# Altium PCB BMS.PcbDoc (part 2 of 2)
Units mil, origin at the board's own origin, x right, y up, seen from the top; angles counter-clockwise.
Board outline 4330.71 x 4330.71 mil, 2 copper layers (Top Layer, Bottom Layer); 161 components, 100 nets, 497 pads, 6 vias.
Unrouted connection lines stored in the file: 354.
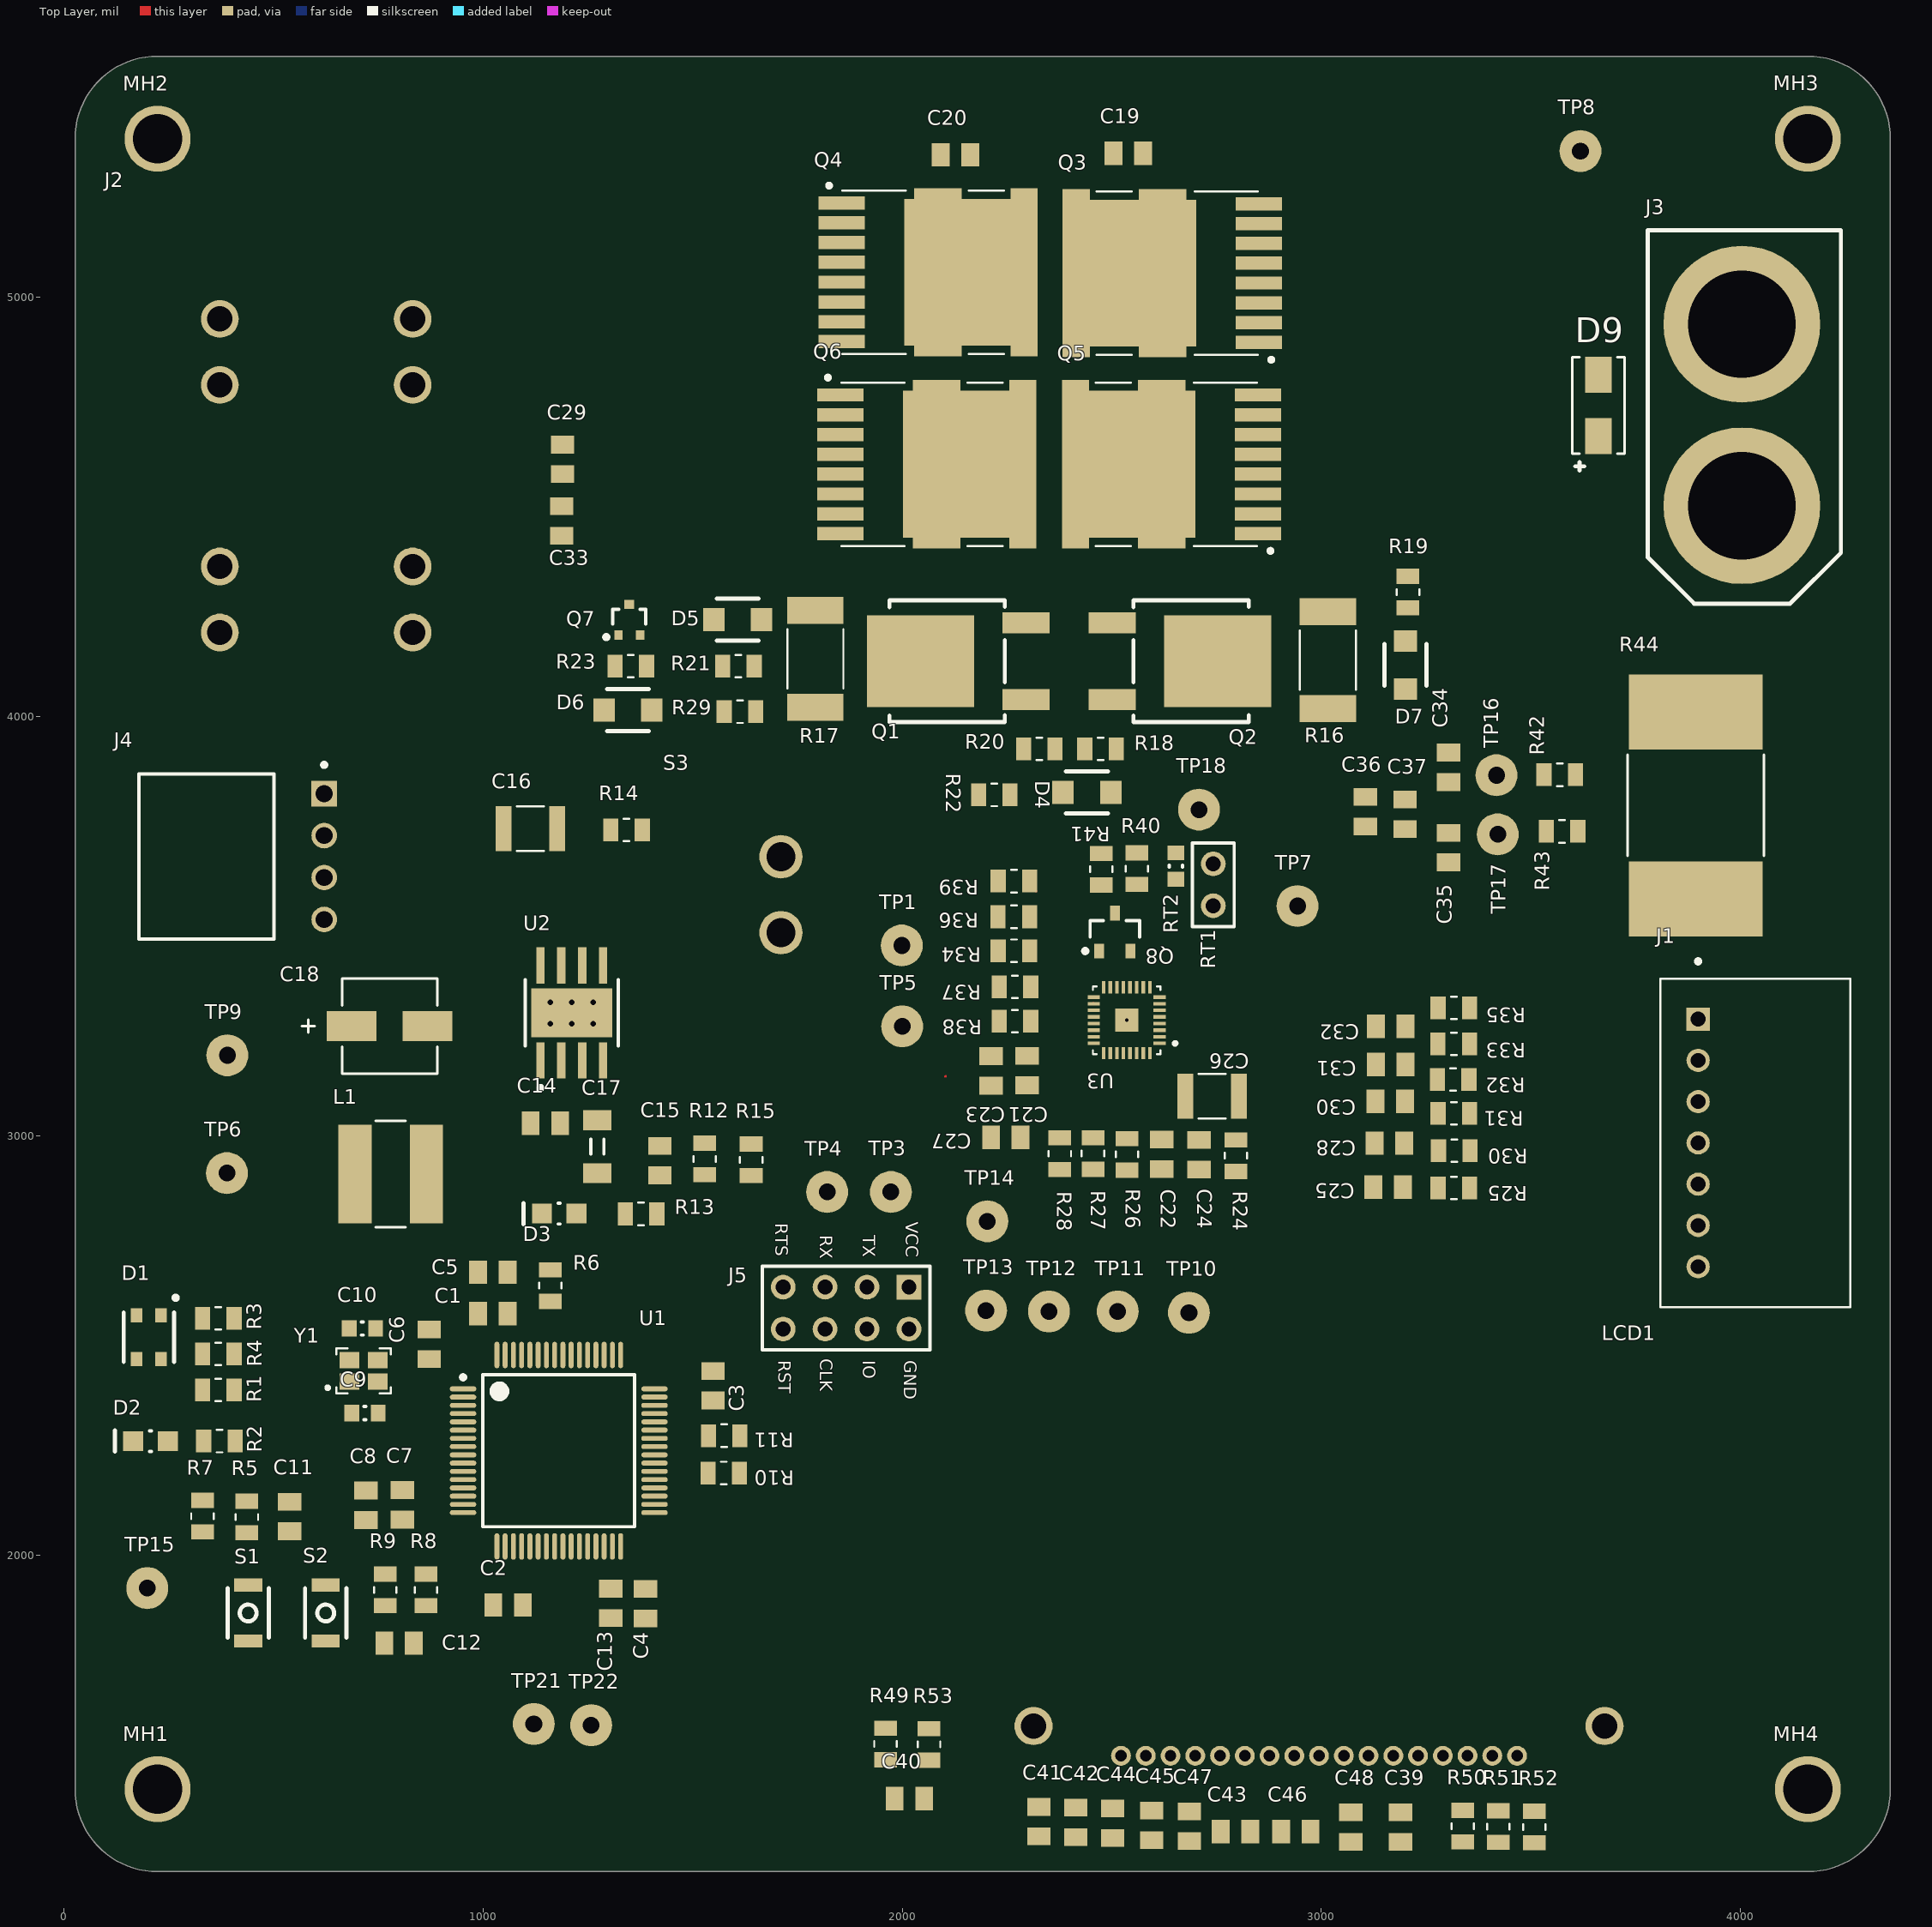
[diagram p0: Top Layer view]

## Part data (continued)
RT2: "THERMISTOR NTC 10K 1% OHM 0603", Case Code (Imperial)=0603, Case Code (Metric)=1608, Manufacturer 1=TDK, Manufacturer Part Number 1=NTCG163JF103FT1, Max Operating Temperature=125°C, Min Operating Temperature=-40°C, Package Quantity=4000, Resistance=10k, Supplier Part Number 1=445-2554-1-ND, Tolerance=1%, Accuracy=1%, Case/Package=0603, ComponentLink1Description=https://datasheet.ciiva.com/11822/0900766b80feea16-11822415.pdf?src-supplier=RSComponents, ComponentLink1URL=https://datasheet.ciiva.com/11822/0900766b80feea16-11822415.pdf?src-supplier=RSComponents, ComponentLink2Description=https://datasheet.ciiva.com/2848/ntcg163jf103ft1-web-2848612.pdf?src-supplier=Digi-Key, ComponentLink2URL=https://datasheet.ciiva.com/2848/ntcg163jf103ft1-web-2848612.pdf?src-supplier=Digi-Key, ComponentLink3Description=https://datasheet.ciiva.com/2848/ntcg163jf103ft1-web-2848610.pdf?src-supplier=Digi-Key, ComponentLink3URL=https://datasheet.ciiva.com/2848/ntcg163jf103ft1-web-2848610.pdf?src-supplier=Digi-Key, ComponentLink4Description=https://datasheet.ciiva.com/2848/ntcg163jf103ft1-web-2848611.pdf?src-supplier=Digi-Key, ComponentLink4URL=https://datasheet.ciiva.com/2848/ntcg163jf103ft1-web-2848611.pdf?src-supplier=Digi-Key, Depth=0.8mm, Height=0.8mm, Lead Free="Lead Free", Length=1.6mm, Mount="Surface Mount", Number of Pins=2, Packaging="Tape and Reel", Pricing 1="1=0.25000, 5=0.23600, 10=0.20900, 25=0.19240, 50=0.15400, 100=0.13200, 500=0.11550, 1000=0.09900 (USD)", Radiation Hardening=No, RoHS=Yes, Stock 1=94107, Supplier 1=Digi-Key
S1 S2: "Tactile Switch (Grey)", Manufacturer 1="Omron Electronics Inc-EMC Div", Manufacturer Part Number 1=B3U-1000P, Supplier Part Number 1=SW1020CT-ND, Mount="Surface Mount", Supplier 1=Digi-Key
S3: "SWITCH SLIDE SPST 500mA (DC) 8.5A (AC) 125V", Current Rating=500mA, Manufacturer 1="CW Industries", Supplier Part Number 1=CWI333-ND, Voltage Rating=125V, Manufacturer Part Number 1=GF-123-0054, Supplier 1=Digi-Key
TP1 TP2 TP3 TP4 TP5 TP6 TP7 TP8 TP9 TP10 TP11 TP12 TP13 TP14 TP15 TP16 TP17 TP18 TP19 TP20 TP21 TP22: "Loop testpoint through-hole pad", Manufacturer 1="Keystone Electronics", Manufacturer Part Number 1=5002, Supplier Part Number 1=36-5002-ND, Mount="Through Hole", Supplier 1=Digi-Key
U1: library part MCU_STM32F446RET6, "ARM Cortex-M4 32-bit MCU+FPU, 512 KB Flash, 128 KB Internal RAM, 50 I/Os, 64-Pin LQFP, -40 to 85 degC, Tray", I/Os (High Current)=50, Operating Frequency(F) (Processor speed) (MHz)=180, Package Description=LQFP64, Package Reference="64-Pin Low-profile Quad Flat Package, Body 10 x 10 mm, Pitch 0.5 mm", Supplier Part Number 1=497-15376-ND, Supply Voltage(Vcc) min (V)=1.7, ComponentLink1Description="Manufacturer URL", ComponentLink1URL=http://www.st.com/, ComponentLink2Description=Datasheet, ComponentLink2URL=http://www.st.com/st-web-ui/static/active/en/resource/technical/document/datasheet/DM00141306.pdf, Core="ARM Cortex-M4", D/A Converter=2, DatasheetVersion="Rev. 6", FLASH Size (Prog) (kB)=512, Internal RAM Size (kB)=128, Mounting Technology="Surface Mount", Packing=Tray, Supplier 1=Digi-Key
U2: library part BUCK_1-28VOUT_1A, "IC REG BUCK ADJUSTABLE 1A 8SOPWR", Manufacturer 1="Texas Instruments", Max Junction Temp=+125°C, Max Supply Voltage=36V, Min Supply Voltage=4V, Nominal Supply Current=75uA, Output Current=1A, Output Voltage=1-28V, Package=DDA0008E, Supplier Part Number 1=296-47267-1-ND, Switching Frequency=400kHz, Temperature="-40°C to +125°C", Temperature Range Low=-40°C, Automotive=No, Category=IC, ComponentLink2Description=Datasheet, ComponentLink2URL=http://www.ti.com/lit/ds/symlink/lmr23610.pdf, Device Class L1="Integrated Circuits (ICs)", Device Class L2="Power Management ICs", Device Class L3="Voltage Regulators - Switching", Digikey Description="IC REG BUCK ADJUSTABLE 1A 8SOPWR", Height=1.7mm, Lead Free=Yes, Manufacturer Part Number 1=LMR23610ADDAR, Max Duty Cycle=97%, Number Of Outputs=1, Octopart=https://octopart.com/lmr23610addar-texas+instruments-68058948, Output Type=AdjustableProgrammable, RoHS=TRUE, Standoff Height=0mm, Supplier 1=Digi-Key, Switching Topology=Buck, Temperature Range High=+125°C
U3: library part BATT_MANAGER, "POWER MANAGEMENT IC: Battery Multi-Function Controller IC Lithium Ion/Polymer 32-VQFN (4x4)", Manufacturer 1="Texas Instruments", Supplier Part Number 1=296-BQ40Z80RSMTCT-ND, Manufacturer Part Number 1=BQ40Z80RSMT, SnapEDA_Link=https://www.snapeda.com/parts/BQ40Z80RSMT/Texas%20Instruments/view-part/2782044/?ref=snap, Supplier 1=Digi-Key
Y1: "CRYSTAL 25.0000MHZ 12PF SMD", Case/Package=SMD/SMT, ESR (Equivalent Series Resistance)=80R, Frequency=25MHz, Frequency Stability=15ppm, Frequency Tolerance=10ppm, Load Capacitance=12pF, Manufacturer 1="Kyocera AVX", Manufacturer Part Number 1=CX2520DB25000H0FLJC1, Max Operating Temperature=85°C, Min Operating Temperature=-30°C, Ratings=AEC-Q200, Supplier Part Number 1=1253-1724-1-ND, ComponentLink1Description=https://media.digikey.com/pdf/Data%20Sheets/AVX%20PDFs/CX2520DB_USY1M-H1-16429-00_Spec.pdf?src-supplier=Digi-Key, ComponentLink1URL=https://media.digikey.com/pdf/Data%20Sheets/AVX%20PDFs/CX2520DB_USY1M-H1-16429-00_Spec.pdf?src-supplier=Digi-Key, Height=0.022inch, Length=0.098inch, Mount="Surface Mount", Packaging="Tape and Reel", Pricing 1="1=0.72000, 10=0.63300, 50=0.59120, 100=0.52250, 500=0.49500, 1000=0.41250 (USD)", RoHS=Yes, Stock 1=11741, Supplier 1=Digi-Key, Width=0.079inch

## Via types
v1: diameter 24.8, hole 12.99, Top Layer to Bottom Layer, 6 vias

## Nets (pads, with @x,y where several pads share a name; then routed paths per layer and width w, separated by ;. In a path a pad name is that pad's centre, name@x,y a point inside that pad or via, vN(x,y) a via of type N, cw(c..) or ccw(c..) an arc to the next point about the centre after c; other vN are vias at no path point)
3V3: C1.2 C2.2 C3.2 C4.2 C5.2 C6.2 C7.2 C8.2 C15.1 C18.1 C38.2 C39.1 C40.1 D1.4 J5.1 J6.4 L1.1 LCD1.12 R5.2 R8.2 R10.2 R11.2 R12.2 R13.2 R45.2 R46.2 R48.2 R49.2 R50.2 R51.2 R52.2 TP9.1 U1.1 U1.13 U1.19 U1.32 U1.48 U1.64
3V3_FB: C15.2 R12.1 R15.2 U2.4
3V3_SW: C14.1 L1.2 U2.1
CELL_1S: J1.2 R35.1
CELL_2S: J1.3 R33.1
CELL_3S: J1.4 R32.1
CELL_4S: J1.5 R31.1
CELL_5S: J1.6 R30.1
CHG: R26.1 TP11.1 U3.29
DEBUG_RX: J5.3 TP4.1 U1.52
DEBUG_TX: J5.2 TP3.1 U1.51
DSG: R28.1 TP13.1 U3.26 | length 30.4
  Top Layer w6: R28.1 2385.09,2994.9 R28.1@2400.2,3010.01
EN_3V3: R14.2 S3.2 U2.5
GND: C1.1 C2.1 C3.1 C4.1 C5.1 C6.1 C7.1 C8.1 C9.1 C10.1 C11.1 C13.1 C16.1 C17.1 C18.2 C21.1 C22.2 C23.1 C24.2 C26.1 C27.1 C34.1 C35.2 C38.1 C39.2 C40.2 C41.1 C42.1 C44.1 C45.1 C47.1 C48.1 D2.2 D3.2 D6.2 D8.2 D9.1 J1.1 J3.2 J4.4 J5.5 J6.3 J6.6 J6.12 J6.13 LCD1.11 LCD1.K Q8.2 R6.2 R14.1 R15.1 R34.2 R37.2 R38.2 R41.1 R42.1 R44.1 R53.1 RT1.2 RT2.2 S1.2 TP6.1 TP7.1 TP14.1 TP15.1 U1.12 U1.18 U1.31 U1.47 U1.63 U2.6 U2.8 U2.9 U3.7 U3.9 U3.12 U3.13 U3.14 U3.15 U3.17 U3.23 U3.27 U3.33 U3.33_1 Y1.2
  other v1: 1160.46,3267.46 1211.65,3267.46 1262.83,3267.46 1160.46,3318.65 1211.65,3318.65 1262.83,3318.65
LCD_A0: LCD1.15 R50.1 U1.27
LCD_MOSI: LCD1.13 TP22.1 U1.23
LCD_SCK: LCD1.14 TP21.1 U1.21
LED: R2.2 U1.8
NetC9_2: C9.2 U1.6 Y1.1
NetC10_2: C10.2 U1.5 Y1.3
NetC11_2: C11.2 R5.1 R7.2 U1.7
NetC12_1: C12.1 S2.2
NetC12_2: C12.2 R8.1 R9.1 U1.26
NetC13_2: C13.2 U1.30
NetC14_2: C14.2 U2.2
NetC17_2: C17.2 U2.3
NetC19_2: C19.2 C20.1
NetC21_2: C21.2 C23.2 R22.1 U3.24 | length 11.3
  Top Layer w6: 2102.78,3141.36 2103.54,3142.13 ; U3.24@2446.8,3220.46 U3.24
NetC22_1: C22.1 C24.1 R24.2 U3.30 | length 4.4
  Top Layer w6: C22.1@2616.8,2993.18 C22.1 ; C24.1@2707.04,2990.94 C24.1@2707.93,2990.04
NetC25_1: C25.1 C28.2 R30.2 U3.1
NetC25_2: C25.2 R25.2 U3.32
NetC26_2: C26.2 U3.31
NetC27_2: C27.2 R29.1 U3.25 | length 42.8
  Top Layer w6: C27.2 2282.27,3003.14 C27.2@2300.53,3021.4 ; U3.25@2480.46,3186.8 U3.25
NetC28_1: C28.1 C30.2 R31.2 U3.2
NetC29_1: C29.1 C33.2
NetC30_1: C30.1 C31.2 R32.2 U3.3
NetC31_1: C31.1 C32.2 R33.2 U3.4
NetC32_1: C32.1 R35.2 U3.5
NetC41_2: C41.2 LCD1.1
NetC42_2: C42.2 LCD1.2
NetC43_1: C43.1 LCD1.7
NetC43_2: C43.2 LCD1.6
NetC44_2: C44.2 LCD1.3
NetC45_2: C45.2 LCD1.4
NetC46_1: C46.1 LCD1.9
NetC46_2: C46.2 LCD1.8
NetC47_2: C47.2 LCD1.5
NetC48_2: C48.2 LCD1.10
NetD1_1: D1.1 R3.2
NetD1_2: D1.2 R4.1
NetD1_3: D1.3 R1.1
NetD2_1: D2.1 R2.1
NetD3_1: D3.1 R13.1
NetD4_1: D4.1 R22.2
NetD4_2: D4.2 Q1.3 Q2.3 Q3.3 Q4.3 Q5.3 Q6.3 R18.2 R20.2
NetD5_2: D5.2 Q4.1 Q6.1 Q7.2 R21.1 R28.2
NetD6_1: D6.1 R23.1
NetD7_1: D7.1 R24.1 TP10.1
NetD8_1: D8.1 R47.1
NetLCD1_A: LCD1.A R49.1 R53.2
NetQ1_1: Q1.1 R17.1
NetQ2_1: Q2.1 R16.2
NetQ2_2: Q2.2 R18.1 R27.2
NetQ3_1: Q3.1 Q5.1 R19.1 R26.2
NetQ7_1: Q7.1 R23.2
NetQ8_1: Q8.1 R41.2 U3.16
NetQ8_3: Q8.3 R40.1 TP18.1
NetR6_1: R6.1 U1.60
NetR9_2: R9.2 S2.1
NetR34_1: R34.1 U3.20
NetR36_2: R36.2 U3.19 | length 1.9
  Top Layer w6: U3.19@2455.7,3300.53 U3.19
NetR37_1: R37.1 U3.21 | length 0
NetR38_1: R38.1 U3.22
NetR39_2: R39.2 U3.18 | length 32.3
  Top Layer w6: R39.2 2304.23,3598.39 R39.2@2319.34,3583.28 ; U3.18@2455.7,3316.28 U3.18
nLCD_CS: LCD1.17 R52.1 U1.20
nLCD_RST: LCD1.16 R51.1 U1.28
nLED_B: R1.2 U1.11
nLED_G: R4.2 U1.10
nLED_R: R3.1 U1.9
nRESET: J5.8 R7.1 S1.1
nSD_CS: J6.1 R48.1 U1.56
PACK+: C20.2 C29.2 D5.1 J2.1 Q4.2 Q6.2 Q7.3 R17.2 R21.2 R29.2
PACK-: C33.1 J2.2 R43.1 R44.2
PCHG: R27.1 TP12.1 U3.28
PDSG: Q1.2 R20.1 R40.2
SD_CD: J6.10 R46.1 U1.42
SD_LED: R47.2 U1.15
SD_MISO: J6.7 TP20.1 U1.35
SD_MOSI: J6.2 TP19.1 U1.36
SD_SCK: J6.5 TP2.1 U1.29
SD_WP: J6.11 R45.1 U1.43
SMB_CLK: J4.3 R11.1 R36.1 TP5.1 U1.41
SMB_DATA: J4.2 R10.1 R39.1 TP1.1 U1.40
SRN: C35.1 C36.2 C37.2 R43.2 TP17.1 U3.6
SRP: C34.2 C36.1 C37.1 R42.2 TP16.1 U3.8
SWD_CLK: J5.7 U1.49
SWD_IO: J5.6 U1.46
THERM_1: RT1.1 U3.10
THERM_2: RT2.1 U3.11
VBAT: C16.2 C19.1 D7.2 D9.2 J1.7 J3.1 Q3.2 Q5.2 R16.1 R19.2 R25.1 S3.1 TP8.1 U2.7
pads on no net: J4.1 J5.4 J6. J6.8 J6.9 J6.14 J6.15 J6.16 MH1.0 MH2.0 MH3.0 MH4.0 U1.2 U1.3 U1.4 U1.14 U1.16 U1.17 U1.22 U1.24 U1.25 U1.33 U1.34 U1.37 U1.38 U1.39 U1.44 U1.45 U1.50 U1.53 U1.54 U1.55 U1.57 U1.58 U1.59 U1.61 U1.62 Y1.4

## Text inside footprints (layer, text, board x,y; h text height)
J5: Top Overlay "TX" at 1905.76,2763.09 h30 r270; Top Overlay "RX" at 1803.4,2763.09 h30 r270; Top Overlay "RTS" at 1697.1,2791.72 h30 r270; Top Overlay "IO" at 1905.76,2463.96 h30 r270; Top Overlay "CLK" at 1803.4,2467.9 h30 r270; Top Overlay "RST" at 1704.19,2463.96 h30 r270; Top Overlay "VCC" at 2008.13,2794.67 h30 r270; Top Overlay "GND" at 2004.19,2463.96 h30 r270